# EAGLE board STM32F3logbord (EAGLE 9.6.2)
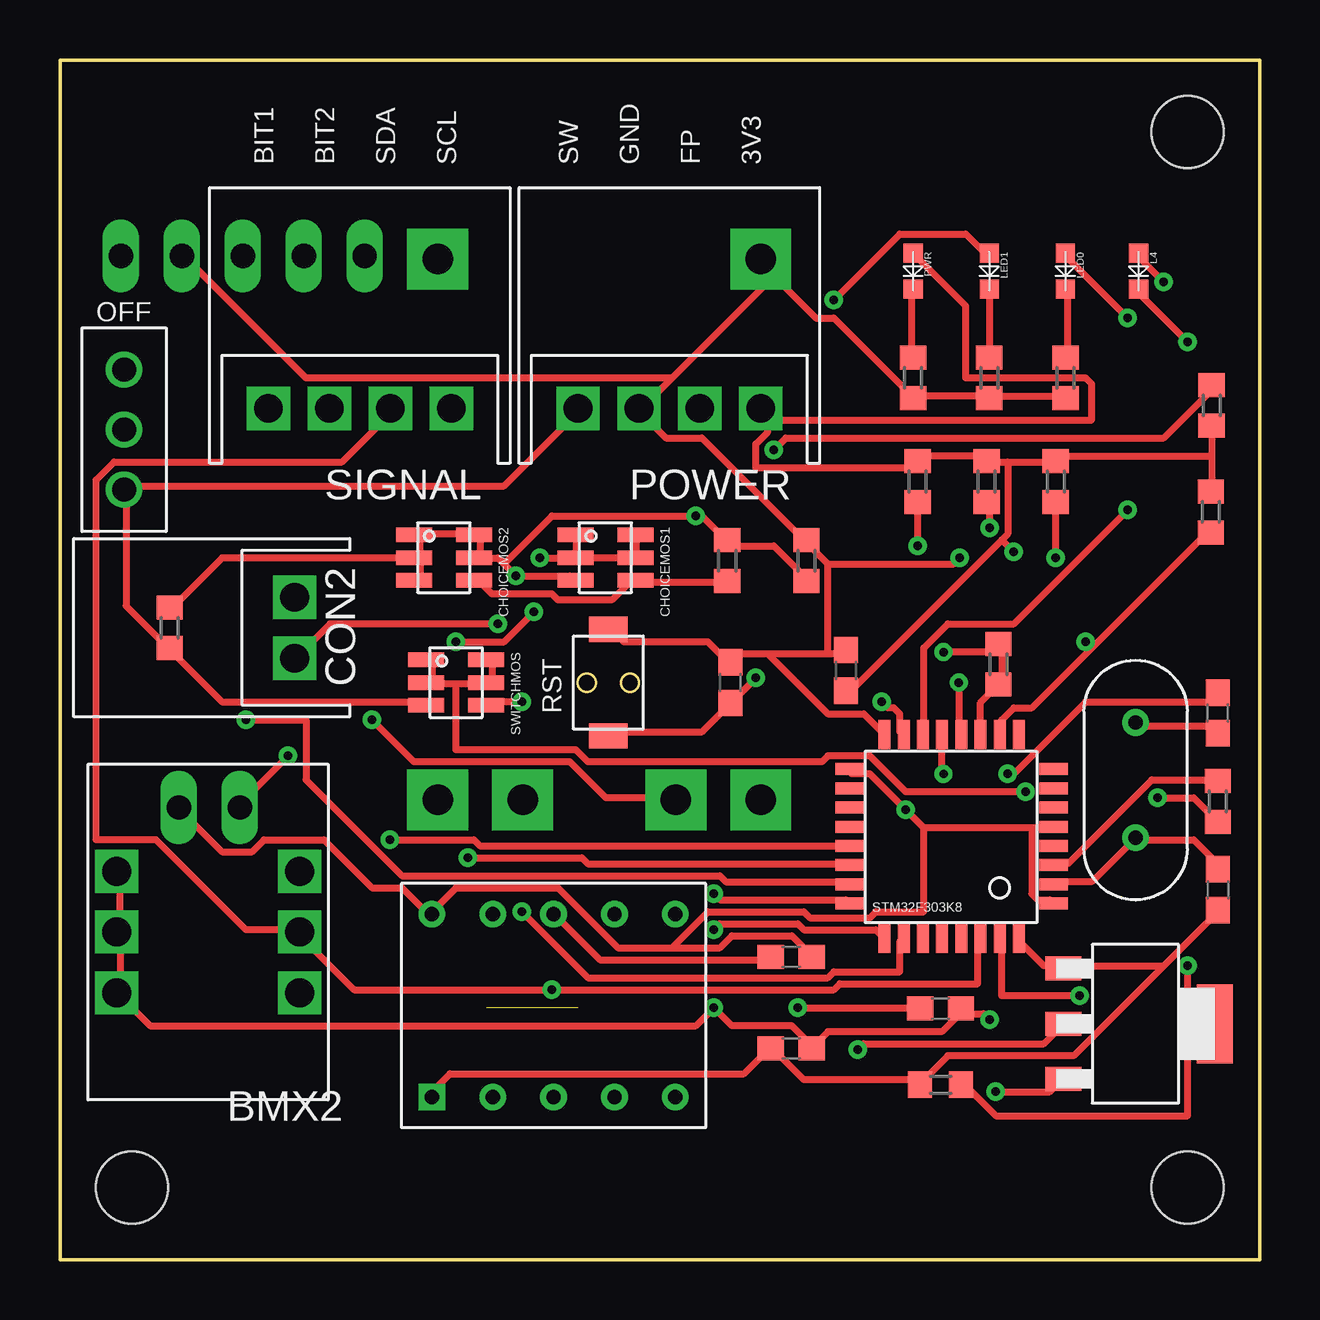
[diagram p0: board, top side]
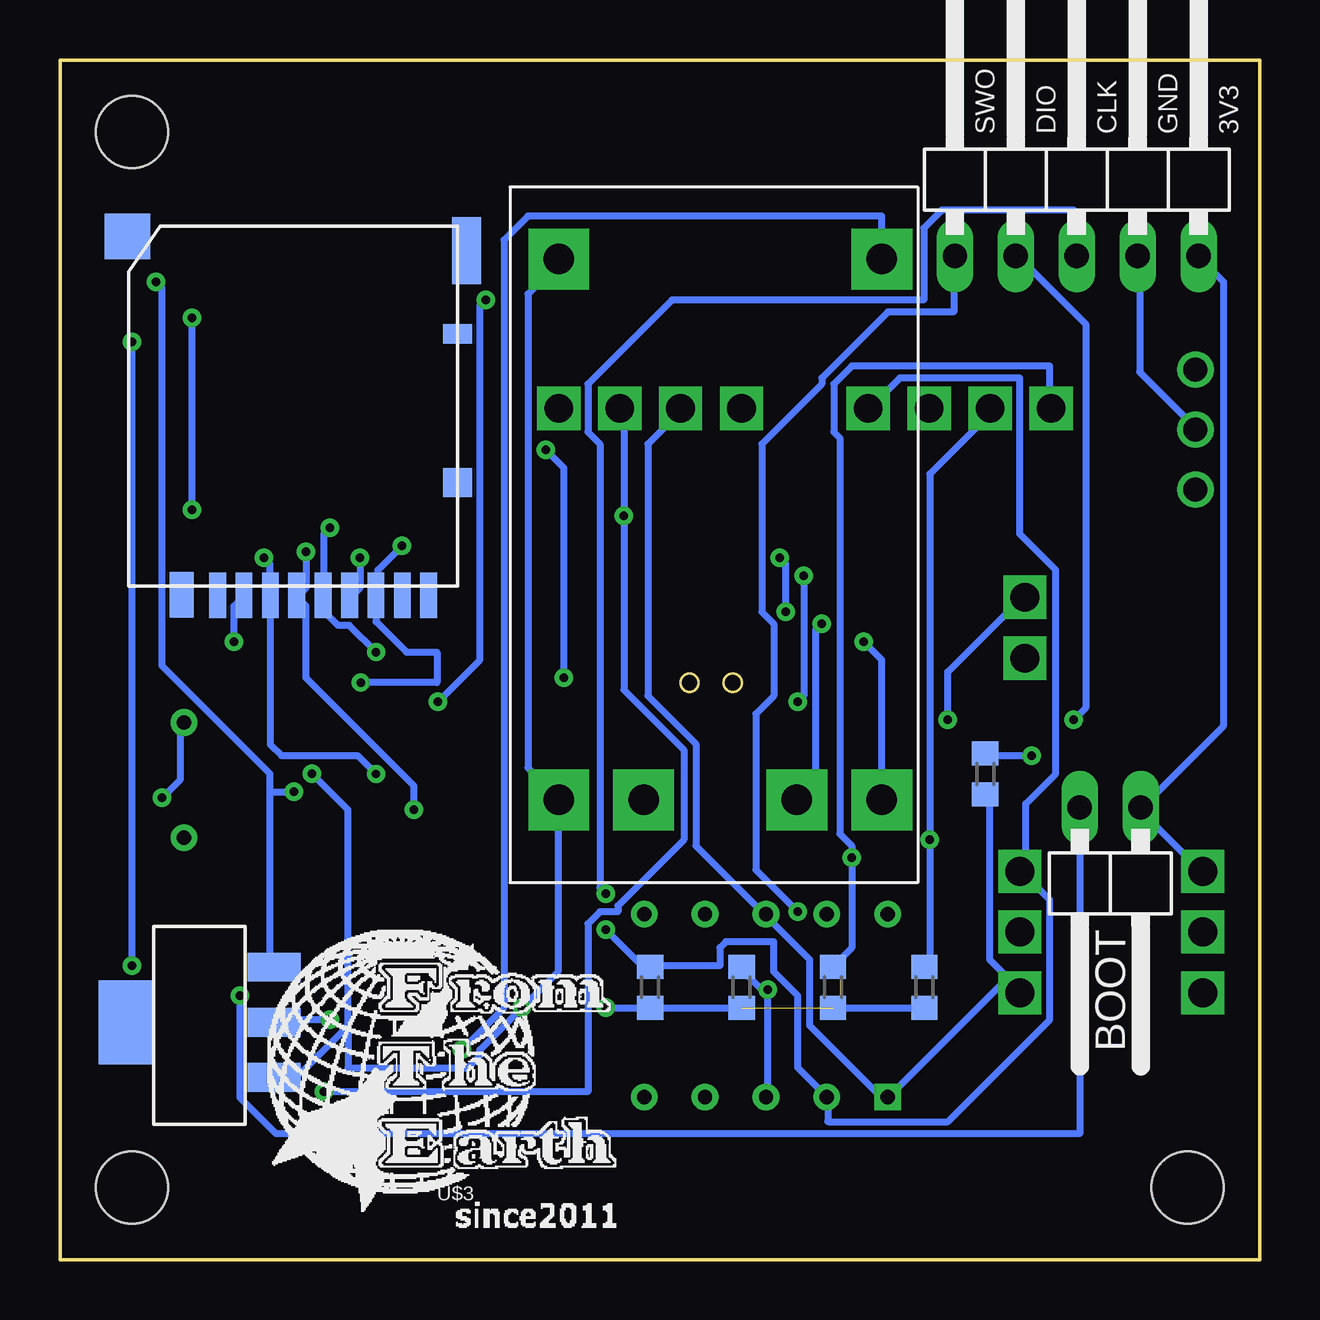
[diagram p1: board, bottom side, seen from below]

Size 50 x 50 mm. Coordinates in mm from the lower left corner, seen from the top.
Outline: 0,0 50,0 50,50 0,50 0,0
Copper layers (1*16): Top 0.035mm / dielectric 1.5mm / Bottom 0.035mm
Design rules "default *": minimum track width 0.3mm, minimum drill 0.35mm, track to track 6mil, track to pad 6mil, pad to pad 6mil, via to via 6mil, smd to smd 6mil, copper to edge 40mil, drill to drill 6mil, minimum pad ring 10mil, minimum via ring 8mil, stop-mask expansion 4mil, vias tented up to drill 0mil, thermal gap 10mil
Holes 3 mm at 47,47 3,3 47,3

## Footprints (pad centres in the part's own frame; a part is rotated, then mirrored left to right if it is on the bottom)
BMX055 = drill 1.2 pad 1.5 square: 3V3 8.81,-9.53; GND 1.19,-4.46; SCL 1.19,-9.53; SDA 1.19,-7; VCC 8.81,-4.46; VCCIO 8.81,-7
1X02/90 = drill 1.016 long: 1 -1.27,-3.81; 2 1.27,-3.81
C1608 = smd 1.1 x 1: 1 -0.85,0; 2 0.85,0
SSM6J808R = smd 0.6 x 1.5: 1 -0.95,-1.25; 2 0,-1.25; 3 0.95,-1.25; 4 0.95,1.25; 5 0,1.25; 6 -0.95,1.25
DM3AT = smd 0.7 x 1.9: CD/DAT3 2.2,6.4; CLK -1.1,6.4; CMD 1.1,6.4; DAT0 -3.3,6.4; DAT1 -4.4,6.4; DAT2 3.3,6.4; DET_B -5.5,6.4; VDD 0,6.4; VSS -2.2,6.4 | smd 1.2 x 0.8: DET_A -6.7,-4.5 | smd 1 x 1.9: P$9 4.8,6.381 | smd 1.2 x 1.2: P$11 -6.7,1.7 | smd 1.2 x 2.8: P$13 -7.081,-7.973 | smd 1.9 x 1.9: P$14 7.054,-8.562
2PIN_SIDE = drill 1.2 square: P$1 -1.27,0; P$2 1.27,0
CRYSTAL = drill 0.6: P$1 2.4,0; P$2 -2.4,0
OSXX1608C1A = smd 0.8 x 0.8: AN -0.75,0; CT 0.75,0
4PIN_SIDE = drill 1.2 square: P$1 -3.81,0; P$2 -1.27,0; P$3 3.81,0; P$4 1.27,0
R0603 = smd 1 x 1.1: 1 -0.85,0; 2 0.85,0
TVAF06-A020B-R = smd 1.6 x 1.05: P$1 0,2.225; P$2 0,-2.225
1X05/90 = drill 1.016 long: 1 -5.08,-3.81; 2 -2.54,-3.81; 3 0,-3.81; 4 2.54,-3.81; 5 5.08,-3.81
SRIDE_SWITCH = drill 1: L -2.5,0; LR 0,0; R 2.5,0
STM32F303K8 = smd 0.5 x 1.2: BOOT 1.6,8.5; PA3/UART2_RX 0.8,0; PA4/SPI1_NSS 1.6,0; PA5/SPI1_SCK 2.4,0; PA6/SPI1_MISO 3.2,0; PA7/SPI1_MOSI 4,0; PA15/I2C1_SCL 6.4,8.5; PB0 4.8,0; PB1 5.6,0; PB3/SWO 5.6,8.5; PB4 4.8,8.5; PB5 4,8.5; PB6 3.2,8.5; PB7/I2C1_SDA 2.4,8.5; VSS 0.8,8.5; VSS2 6.4,0 | smd 1.2 x 0.5: NRST -0.65,4.65; PA0 -0.65,3.05; PA1 -0.65,2.25; PA2/UART2_TX -0.65,1.45; PA8 7.85,2.25; PA9/UART1_TX 7.85,3.05; PA10/UART1_RX 7.85,3.85; PA11/CAN_RX 7.85,4.65; PA12/CAN_TX 7.85,5.45; PA13/SWDIO 7.85,6.25; PA14/SWCLK 7.85,7.05; PF0 -0.65,6.25; PF1 -0.65,5.45; VDD -0.65,7.05; VDD2 7.85,1.45; VDDA -0.65,3.85
ADXL375 = drill 0.6 square: GND1 1.27,-1.27 | drill 0.6: GND2 8.89,-6.35; INT1 8.89,-8.89; INT2 8.89,-11.43; SCK 1.27,-3.81; SDA 1.27,-6.35; SDO 1.27,-8.89; VDDI 8.89,-1.27; VS 8.89,-3.81; ~CS 1.27,-11.43
AZ1117C = smd 2.2 x 1.2: ADJ/GND 8.2,-6.3; INPUT 8.2,-1.7; OUTPUT 8.2,-4 | smd 2.2 x 3.5: VOUT 2,-4
SOT-223 = smd 3.3 x 1.5: 1 0,3.3 | smd 1 x 1.5: 2 0,-3; 3 2.3,-3; 4 -2.3,-3
TP4056_MODULE = drill 1.27 pad 2.54 square: 5V 0,0; BATTERY+ 22.54,-3.54; BATTERY- 22.54,-9.92; GND 0,-13.46; V+ 22.54,0; V- 22.54,-13.46

## Placement (x,y rotation side)
BMX2  BMX055  [BMX055]  11.18,6.65 180 top
BOOT  [1X02/90]  6.22,15.03 180 bottom
C1  100nF  [C1608]  30.48,12.62 180 top
C2  100nF  [C1608]  36.7,10.46 180 top
C3  4.7uF  [C1608]  32.77,24.56 90 top
C4  10nF  [C1608]  30.48,8.81 180 top
C5  0.1uF  [C1608]  27.94,24.05 90 top
C6  30pF  [C1608]  48.26,15.41 270 top
C7  30pF  [C1608]  48.26,22.78 90 top
CHOICEMOS1  [SSM6J808R]  22.73,29.26 270 top
CHOICEMOS2  [SSM6J808R]  16,29.26 270 top
CN1  DM3AT  [DM3AT]  40.13,34.08 180 bottom
CON2  [2PIN_SIDE]  9.78,26.34 270 top
CRY1  [CRYSTAL]  44.83,19.99 270 top
L4  [OSXX1608C1A]  44.96,41.2 270 top
LED0  [OSXX1608C1A]  41.91,41.2 270 top
LED1  [OSXX1608C1A]  38.73,41.2 270 top
POWER  [4PIN_SIDE]  25.4,35.48 180 top
PWR  [OSXX1608C1A]  35.56,41.2 270 top
R1  10k or DNF  [R0603]  48.01,35.61 270 top
R2  10k  [R0603]  11.43,20.24 270 bottom
R3  100  [R0603]  41.91,36.75 90 top
R4  100  [R0603]  38.73,36.75 90 top
R5  10k  [R0603]  35.74,32.43 270 top
R6  10k  [R0603]  38.62,32.43 270 top
R7  10k  [R0603]  41.51,32.43 270 top
R8  10k  [R0603]  47.97,31.16 270 top
R9  10k  [R0603]  25.4,11.35 270 bottom
R10  100  [R0603]  39.12,24.81 90 top
R11  DNF  [R0603]  48.26,19.1 90 top
R12  100k  [R0603]  27.81,29.13 90 top
R14  100k  [R0603]  31.11,29.13 270 top
R15  100  [R0603]  36.7,7.29 180 top
R16  100  [R0603]  35.56,36.75 90 top
R17  10k  [R0603]  21.59,11.35 270 bottom
R18  10k  [R0603]  17.78,11.35 270 bottom
R19  10k  [R0603]  13.97,11.35 270 bottom
RST  [TVAF06-A020B-R]  22.86,24.05 180 top
SIGNAL  [4PIN_SIDE]  12.5,35.48 180 top
STLINK  [1X05/90]  7.62,45.64 0 bottom
SW1  SRIDE_SWITCH  [SRIDE_SWITCH]  2.67,34.59 90 top
SWITCHMOS  [SSM6J808R]  16.51,24.05 270 top
SWITCHRES  100k  [R0603]  4.57,26.34 90 top
U$1  STM32F303K8  [STM32F303K8]  40.77,21.89 180 top
U$2  ADXL375  [ADXL375]  14.22,5.51 90 top
U$3  F.T.E.LOGO  [LOGO]  41.91,-0.08 0 bottom
U$4  AZ1117C  [AZ1117C]  49.28,13.89 0 bottom
U$5  LT1117-5  [SOT-223]  44.83,9.83 270 top
U$6  TP5046_MODULE  [TP4056_MODULE]  15.75,41.7 270 bottom

## Library data of the parts
BMX2 = BMX055
BOOT STLINK = pinhead
C1-C7 = rcl; SPICEPREFIX: C
CHOICEMOS1 CHOICEMOS2 SWITCHMOS = Chip MOSFET
CN1 = microSD
CON2 POWER SIGNAL = XR Connector
CRY1 = Crystal
L4 LED0 LED1 PWR = Chip LED
R1-R12 R14-R19 SWITCHRES = rcl; SPICEPREFIX: R
RST = Tact switch
SW1 = Sride Switch
U$1 = STM32F303K8
U$2 = ADXL375
U$3 = logo
U$4 = AZ1117C
U$5 = LT1117
U$6 = TP4056_module

## Nets
+3V3: BMX2.3V3 BMX2.VCC BMX2.VCCIO BOOT.1 C1.1 C2.1 C3.1 C4.1 CN1.VDD POWER.P$1 PWR.AN R1.2 R5.1 R6.1 R7.1 R8.1 R9.2 R17.2 R18.2 R19.2 STLINK.5 U$1.VDD U$1.VDD2 U$1.VDDA U$2.VDDI U$4.OUTPUT
BIT1: R18.1 SIGNAL.P$3 U$1.PA12/CAN_TX
BIT2: R19.1 SIGNAL.P$4 U$1.PA11/CAN_RX
BOOT0: BOOT.2 R2.1 U$1.BOOT
FPLOW: CHOICEMOS1.3 CHOICEMOS2.1 CHOICEMOS2.2 CHOICEMOS2.3 CHOICEMOS2.5 CHOICEMOS2.6 POWER.P$2 R12.2 R14.2 SWITCHMOS.4 SWITCHRES.2 U$5.3
GND: BMX2.GND C1.2 C2.2 C3.2 C4.2 C5.2 C6.2 C7.2 CN1.VSS POWER.P$4 R2.2 R3.1 R4.1 R14.1 R15.2 R16.1 RST.P$2 STLINK.4 SW1.LR U$1.VSS U$1.VSS2 U$2.GND1 U$2.GND2 U$4.ADJ/GND U$5.4 U$6.GND U$6.V-
LED0: LED0.AN U$1.PB0
LED1: LED1.AN U$1.PB1
MAINBATTE: CHOICEMOS1.1 CHOICEMOS1.2 CHOICEMOS1.5 CHOICEMOS1.6 U$6.V+
MISO: CN1.DAT0 R5.2 U$1.PA6/SPI1_MISO
MOSI: CN1.CMD R7.2 U$1.PA7/SPI1_MOSI
N$1: U$1.NRST
N$2: PWR.CT R16.2
N$3: LED0.CT R3.2
N$4: LED1.CT R4.2
N$5: U$5.2 U$6.5V
N$7: C7.1 CRY1.P$2 R11.1
N$10: CHOICEMOS1.4 CHOICEMOS2.4 R12.1
N$11: L4.AN SWITCHMOS.1 SWITCHMOS.2 SWITCHMOS.5 SWITCHMOS.6 U$4.INPUT
N$12: CON2.P$2 U$6.BATTERY+
N$13: CON2.P$1 U$6.BATTERY-
N$16: L4.CT R15.1
NRST: C5.1 R1.1 RST.P$1
NSS: CN1.CD/DAT3 R8.2 U$1.PA4/SPI1_NSS
OSC_IN: C6.1 CRY1.P$1 U$1.PF0
OSC_OUT: R11.2 U$1.PF1
SCK: CN1.CLK R6.2 R10.1 R10.2 U$1.PA5/SPI1_SCK
SCL: BMX2.SCL R9.1 SIGNAL.P$1 U$1.PA15/I2C1_SCL U$2.SCK
SDA: BMX2.SDA R17.1 SIGNAL.P$2 U$1.PB7/I2C1_SDA U$2.SDA
SWCLK: STLINK.3 U$1.PA14/SWCLK
SWDIO: STLINK.2 U$1.PA13/SWDIO
SWITCH: POWER.P$3 SW1.L SWITCHMOS.3 SWITCHRES.1
SWO: STLINK.1 U$1.PB3/SWO

## Tracks (layer width: path | path; a pad name or v marks a point on that pad's centre or on a via)
+3V3  (via drill 0.35)  (1 unrouted)
  Top 0.3: 29.5,35 43,35 43,36.5 42.75,36.75 37.75,36.75 37.75,39.75 35.75,41.75 PWR.AN | 29.5,35 29.25,35.25 POWER.P$1 29.5,35 | 48,33.5 R1.2 | 48,33.5 48,32.25 R8.1 | 39.25,30 39.5,30.25 39.5,33.25 | 39.25,30 33,23.75 C3.1 | 39.5,33.25 38.75,33.25 R6.1 38.5,33.5 35.75,33.5 R5.1 35.5,33.25 35.25,33 29,33 29,34 29.5,34.5 29.5,35 | 39.5,33.25 41.5,33.25 R7.1 41.75,33.5 48,33.5 | 39.25,30 v39.75,29.5 | 40.5,18 40.5,15.25 40.75,15 41.25,15 U$1.VDD | 40.5,18 41.25,18 U$1.VDDA | 36,18 v35.25,18.75 33.75,20.25 33,20.25 U$1.VDD2 | 40.5,18 36,18 | 25.5,13 23.25,13 20.75,15.5 16.5,15.5 15.5,14.5 U$2.VDDI 15.25,14.5 14.25,15.5 13,15.5 11,17.5 8.5,17.5 8,17 6.75,17 5,18.75 BOOT.1 | 25.5,13 27.5,13 28,13.5 30.5,13.5 31.25,12.75 C1.1 | 36,18 36,14.5 34,14.5 33.75,14.25 31.25,14.25 31,14.5 27,14.5 25.5,13 | v38.75,10 38.5,10.25 37.75,10.25 C2.1 37.5,10.25 36.75,9.5 32,9.5 31.5,9 C4.1 31.25,9 30.5,9.75 28,9.75 v27.25,10.5 26.5,9.75 3.75,9.75 2.5,11 BMX2.VCC 2.5,11.25 2.5,13.5 BMX2.VCCIO 2.5,13.75 2.5,16 BMX2.3V3
  Bottom 0.3: v39.75,29.5 39.75,28 40,27.75 CN1.VDD 40,27.5 39.75,27.25 39.75,24.25 35.25,19.75 v35.25,18.75 | R17.2 R9.2 v27.25,10.5 | v38.75,10 41,10 U$4.OUTPUT | STLINK.5 2.5,41.75 1.5,40.75 1.5,22.25 4.75,19 BOOT.1 4.75,18.75 4.75,18.5 2.5,16.25 BMX2.3V3 | R18.2 R19.2
BIT1  (via drill 0.35)
  Top 0.3: v17,16.75 21.75,16.75 22,16.5 32.75,16.5 U$1.PA12/CAN_TX
  Bottom 0.3: R18.1 17.75,12.25 17,13 v17,16.75 17,17.25 17.5,17.75 17.5,34.25 17.75,34.5 17.75,36.5 17,37.25 8.75,37.25 8.75,35.5 SIGNAL.P$3
BIT2  (via drill 0.35)
  Top 0.3: v13.75,17.5 17.25,17.5 17.5,17.25 32.75,17.25 U$1.PA11/CAN_RX
  Bottom 0.3: R19.1 13.75,12.25 v13.75,17.5 13.75,32.75 11.25,35.25 SIGNAL.P$4
BOOT0  (via drill 0.35)
  Top 0.3: v9.5,21 7.5,19 BOOT.2 | v42.5,11 39.25,11 39.25,13.25 U$1.BOOT
  Bottom 0.3: v9.5,21 11.25,21 R2.1 | v42.5,11 42.5,6.75 41,5.25 7.5,5.25 7.5,18.75 BOOT.2
FPLOW  (via drill 0.35)
  Top 0.3: SWITCHRES.2 4.75,27.25 6.75,29.25 CHOICEMOS2.2 | CHOICEMOS2.3 15,28.5 15,29.25 CHOICEMOS2.2 | CHOICEMOS2.2 15,29.5 15,30 CHOICEMOS2.1 15,30.25 17.25,30.25 CHOICEMOS2.6 17.5,30 17.5,29.5 CHOICEMOS2.5 17.5,29.25 18.25,29.25 18.5,29 | R14.2 31,28.5 29.75,29.75 28,29.75 R12.2 27.75,30 26.75,31 v26.5,31 20.5,31 18.5,29 | v19.25,23.25 18,23.25 SWITCHMOS.4 | 18.5,29 v19,28.5 21.25,28.5 CHOICEMOS1.3 | v39,7 41.25,7 41.75,7.5 U$5.3
  Bottom 0.3: v19.25,23.25 19,23.5 v19,28.5 | v39,7 28,7 28,14 27.5,14.5 26.75,14.5 26.75,14.75 24,17.5 24,21.25 26.5,23.75 v26.5,31 26.5,35.25 POWER.P$2
GND  (via drill 0.35)
  Top 0.3: 46,12.25 48.25,14.5 C6.2 | 46,12.25 42,12.25 U$5.4 41.75,12.25 41,12.25 40,13.25 U$1.VSS | 46,12.25 42.25,8.5 37,8.5 36,7.5 R15.2 35.75,7.5 31,7.5 29.75,8.75 C4.2 29.5,8.75 28.5,7.75 16.25,7.75 15.5,7 U$2.GND1 | C1.2 29.5,12.5 22.5,12.5 20.75,14.25 U$2.GND2 | v30.75,10.5 35.75,10.5 C2.2 | v39.5,20.25 39.75,20.25 42.75,23.25 48,23.25 48.25,23.5 C7.2 | 32,25.25 32.75,25.25 C3.2 | 32,25.25 29.5,25.25 | 29.5,25.25 28.25,25.25 28,25 C5.2 27.75,25 27,25.75 23.5,25.75 23,26.25 RST.P$2 | 32,29 31.25,29.75 R14.1 31,30 26.75,34.25 25.25,34.25 24.25,35.25 POWER.P$4 24.25,35.5 25.5,36.75 | 32,25.25 32,29 | 29.5,25.25 32,22.75 33.5,22.75 34.25,22 U$1.VSS2 | v37.5,29.25 37.25,29 32,29 | R3.1 41.75,36 38.75,36 R4.1 38.5,36 35.75,36 R16.1 35.5,36 32.25,39.25 31.5,39.25 29.75,41 | 29.75,41 29.25,41.5 U$6.GND 29.75,41 | 29.75,41 25.5,36.75 | 25.5,36.75 10.25,36.75 5.25,41.75 STLINK.4
  Bottom 0.3: 10.5,11.75 10,11.25 BMX2.GND 10.5,11.75 | 10.5,11.75 11.25,12.5 11.25,19.25 R2.2 | 10.5,11.75 15.25,7 U$2.GND1 15.5,7 16,7 18.75,9.75 18.75,12.5 20.5,14.25 U$2.GND2 20.75,14.5 23.5,17.25 23.5,21.5 25.5,23.5 25.5,34 24.25,35.25 POWER.P$4 | v39.5,20.25 38,18.75 38,9.75 | 38,9.75 40,7.75 41,7.75 U$4.ADJ/GND | 38,9.75 38,8 33,8 32.5,8.5 32.5,8.75 v30.75,10.5 29.25,12 29.25,19 U$6.V- 29.25,19.25 30.5,20.5 30.5,40.25 29.25,41.5 U$6.GND | v37.5,29.25 37.5,28 37.75,27.75 CN1.VSS | SW1.LR 2.75,34.75 5,37 5,41.75 STLINK.4
LED0  (via drill 0.35)
  Top 0.3: v44.5,39.25 42,41.75 LED0.AN | v44.5,31.25 39.75,26.5 37,26.5 36,25.5 36,22 U$1.PB0
  Bottom 0.3: v44.5,31.25 v44.5,39.25
LED1  (via drill 0.35)
  Top 0.3: v32.25,40 35,42.75 37.75,42.75 38.5,42 LED1.AN | v34.25,23.25 34.5,23 34.75,23 35,22.75 35,22 U$1.PB1
  Bottom 0.3: v32.25,40 32.5,39.75 32.5,25 v34.25,23.25
MAINBATTE  (via drill 0.35)
  Top 0.3: CHOICEMOS1.2 21.5,29.5 21.5,30 CHOICEMOS1.1 | CHOICEMOS1.6 24,30 24,29.5 CHOICEMOS1.5 23.75,29.25 21.5,29.25 CHOICEMOS1.2 | v20,29.25 21.25,29.25 CHOICEMOS1.2 | v19.75,27 18.5,25.75 v16.5,25.75
  Bottom 0.3: v20,29.25 19.75,29 v19.75,27 | v16.5,25.75 15.75,25 15.75,19.25 U$6.V+
MISO  (via drill 0.35)
  Top 0.3: U$1.PA6/SPI1_MISO 37.47,21.99 v37.47,24.05 | v35.75,29.75 35.75,31.5 R5.2
  Bottom 0.3: v37.47,24.05 34.29,24.05 34.29,25.32 35.56,25.32 36.83,26.59 CN1.DAT0 36.75,27.75 36.75,28.75 v35.75,29.75
MOSI  (via drill 0.35)
  Top 0.3: v36.83,20.24 36.77,20.3 U$1.PA7/SPI1_MOSI | v41.5,29.25 41.5,31.5 R7.2
  Bottom 0.3: v36.83,20.24 37.59,21 40.77,21 41.23,21.47 CN1.CMD 41.25,27.75 41.25,29 v41.5,29.25
N$2
  Top 0.3: PWR.CT 35.5,40.25 35.5,37.75 R16.2
N$3
  Top 0.3: LED0.CT 42,40.25 42,37.75 R3.2
N$4
  Top 0.3: LED1.CT 38.75,40.25 38.75,37.75 R4.2
N$5  (via drill 0.35)
  Top 0.3: v33.25,8.75 33.5,9 41,9 41.75,9.75 U$5.2
  Bottom 0.3: v33.25,8.75 31.5,10.5 31.5,42.5 30.5,43.5 15.75,43.5 15.75,41.75 U$6.5V
N$7  (via drill 0.35)
  Top 0.3: v45.75,19.25 47.25,19.25 R11.1 | C7.1 48.25,22 48,22.25 45,22.25 CRY1.P$2
  Bottom 0.3: v45.75,19.25 45,20 45,22.25 CRY1.P$2
N$10
  Top 0.3: R12.1 27.75,28.25 24,28.25 CHOICEMOS1.4 23.75,28.25 23,27.5 20.75,27.5 20.5,27.75 18,27.75 17.5,28.25 CHOICEMOS2.4
N$11  (via drill 0.35)
  Top 0.3: SWITCHMOS.1 15.5,25 15.5,24.25 SWITCHMOS.2 15.5,24 16.5,24 | SWITCHMOS.6 18,25 18,24.25 SWITCHMOS.5 17.75,24 16.5,24 | v46,40.75 45,41.75 L4.AN | 16.5,24 16.5,21.25 21.5,21.25 22,20.75 31.75,20.75 32,21 33.75,21 35.25,19.5 v40.25,19.5
  Bottom 0.3: v46,40.75 45.75,40.5 45.75,24.75 41.25,20.25 41.25,19.5 | 41.25,19.5 41.25,12.25 U$4.INPUT | 41.25,19.5 v40.25,19.5
N$12  (via drill 0.35)
  Top 0.3: v18.25,26.5 11.25,26.5 10,25.25 CON2.P$2
  Bottom 0.3: v18.25,26.5 18.5,26.25 18.5,20 19.25,19.25 U$6.BATTERY+
N$13  (via drill 0.35)
  Top 0.3: v13,22.5 14.75,20.75 21.25,20.75 22.75,19.25 25.5,19.25 U$6.BATTERY-
  Bottom 0.3: v13,22.5 13,24.5 10,27.5 CON2.P$1
N$16  (via drill 0.35)
  Top 0.3: v47,38.25 45,40.25 L4.CT | v47,12.25 47,6 39,6 37.75,7.25 R15.1
  Bottom 0.3: v47,12.25 v47,38.25
NRST  (via drill 0.35)
  Top 0.3: RST.P$1 23,22 26.75,22 27.75,23 C5.1 28,23.25 v29,24.25 | v29.75,33.75 30.25,34.25 46,34.25 48,36.25 R1.1
  Bottom 0.3: v29.75,33.75 29,33 v29,24.25
NSS  (via drill 0.35)
  Top 0.3: 43,25.5 40.5,23 39.75,23 39.25,22.5 39.25,22 U$1.PA4/SPI1_NSS | 43,25.5 47.75,30.25 R8.2 | 43,25.5 v42.75,25.75
  Bottom 0.3: v42.75,25.75 42.75,27.25 42.5,27.5 CN1.CD/DAT3
OSC_IN
  Top 0.3: C6.1 48.25,16.5 47.25,17.5 45,17.5 CRY1.P$1 44.75,17.5 43,15.75 41.5,15.75 U$1.PF0
OSC_OUT
  Top 0.3: R11.2 48.25,20 45.5,20 42,16.5 41.5,16.5 U$1.PF1
SCK  (via drill 0.35)
  Top 0.3: v36.83,25.32 38.77,25.32 R10.2 39.25,25.5 39.25,24 R10.1 38.37,23.21 U$1.PA5/SPI1_SCK | v38.75,30.5 38.75,31.5 R6.2
  Bottom 0.3: v36.83,25.32 37.94,26.43 38.41,26.43 39.08,27.1 39.12,27.1 39.12,27.6 CN1.CLK 39,27.75 39,30.25 v38.75,30.5
SCL  (via drill 0.35)
  Top 0.3: v27.25,13.75 27.5,14 30.75,14 31,13.75 34,13.75 34.25,13.5 U$1.PA15/I2C1_SCL
  Bottom 0.3: v27.25,13.75 25.5,12 R9.1 25.25,12.25 22.5,12.25 22.5,13 22.25,13.25 20.25,13.25 20.25,12 19.25,11 19.25,8 18.25,7 U$2.SCK 18,6.75 18,5.75 13,5.75 8.75,10 8.75,15 9.75,16 BMX2.SCL 9.75,16.25 9.75,19 8.5,20.25 8.5,28.75 10,30.25 10,36.75 15,36.75 16.25,35.5 SIGNAL.P$1
SDA  (via drill 0.35)
  Top 0.3: U$1.PB7/I2C1_SDA 38.25,13.25 38.25,11.5 32.5,11.5 32.25,11.25 v20.5,11.25 12.25,11.25 10,13.5 BMX2.SDA 9.75,13.75 7.75,13.75 4,17.5 1.5,17.5 1.5,32.5 2.25,33.25 11.75,33.25 13.75,35.25 SIGNAL.P$2
  Bottom 0.3: 20.75,11.25 20.5,11 20.5,7 U$2.SDA | 20.75,11.25 21.5,12 R17.1 | v20.5,11.25 20.75,11.25
SWCLK  (via drill 0.35)
  Top 0.3: v27.25,15.25 27.5,15 32.75,15 U$1.PA14/SWCLK
  Bottom 0.3: v27.25,15.25 27.5,15.5 27.5,34 28,34.5 28,36.5 24.5,40 14,40 14,43 13.25,43.75 7.75,43.75 7.75,42 STLINK.3
SWDIO  (via drill 0.35)
  Top 0.3: v7.75,22.5 10.25,22.5 10.25,20 14.25,16 27.5,16 27.75,15.75 32.75,15.75 U$1.PA13/SWDIO
  Bottom 0.3: v7.75,22.5 7.25,23 7.25,39 10,41.75 STLINK.2
SWITCH
  Top 0.3: SWITCHMOS.3 15.25,23.25 6.75,23.25 4.75,25.25 SWITCHRES.1 4.5,25.5 2.75,27.25 2.75,32 SW1.L 2.75,32.25 18.5,32.25 21.5,35.25 POWER.P$3
SWO  (via drill 0.35)
  Top 0.3: v19.25,14.5 22,11.75 32,11.75 32.25,12 35,12 35,13.25 U$1.PB3/SWO
  Bottom 0.3: v19.25,14.5 21,16.25 21,22.75 20.25,23.5 20.25,26.5 20.75,27 20.75,34 18.25,36.5 18.25,36.75 15.5,39.5 12.75,39.5 12.75,41.75 STLINK.1

## Text on the board
tPlace: BIT1 | BIT2 | SDA | SCL | SW | GND | FP | 3V3 | OFF
bPlace: 3V3 | GND | CLK | DIO | SWO